# Altium PCB Left.PcbDoc
Units mm, origin at the board's own origin, x right, y up, seen from the top; angles counter-clockwise.
Board outline 24.13 x 34.29 mm, 2 copper layers (Top Layer, Bottom Layer); 33 components, 41 nets, 155 pads, 53 vias.
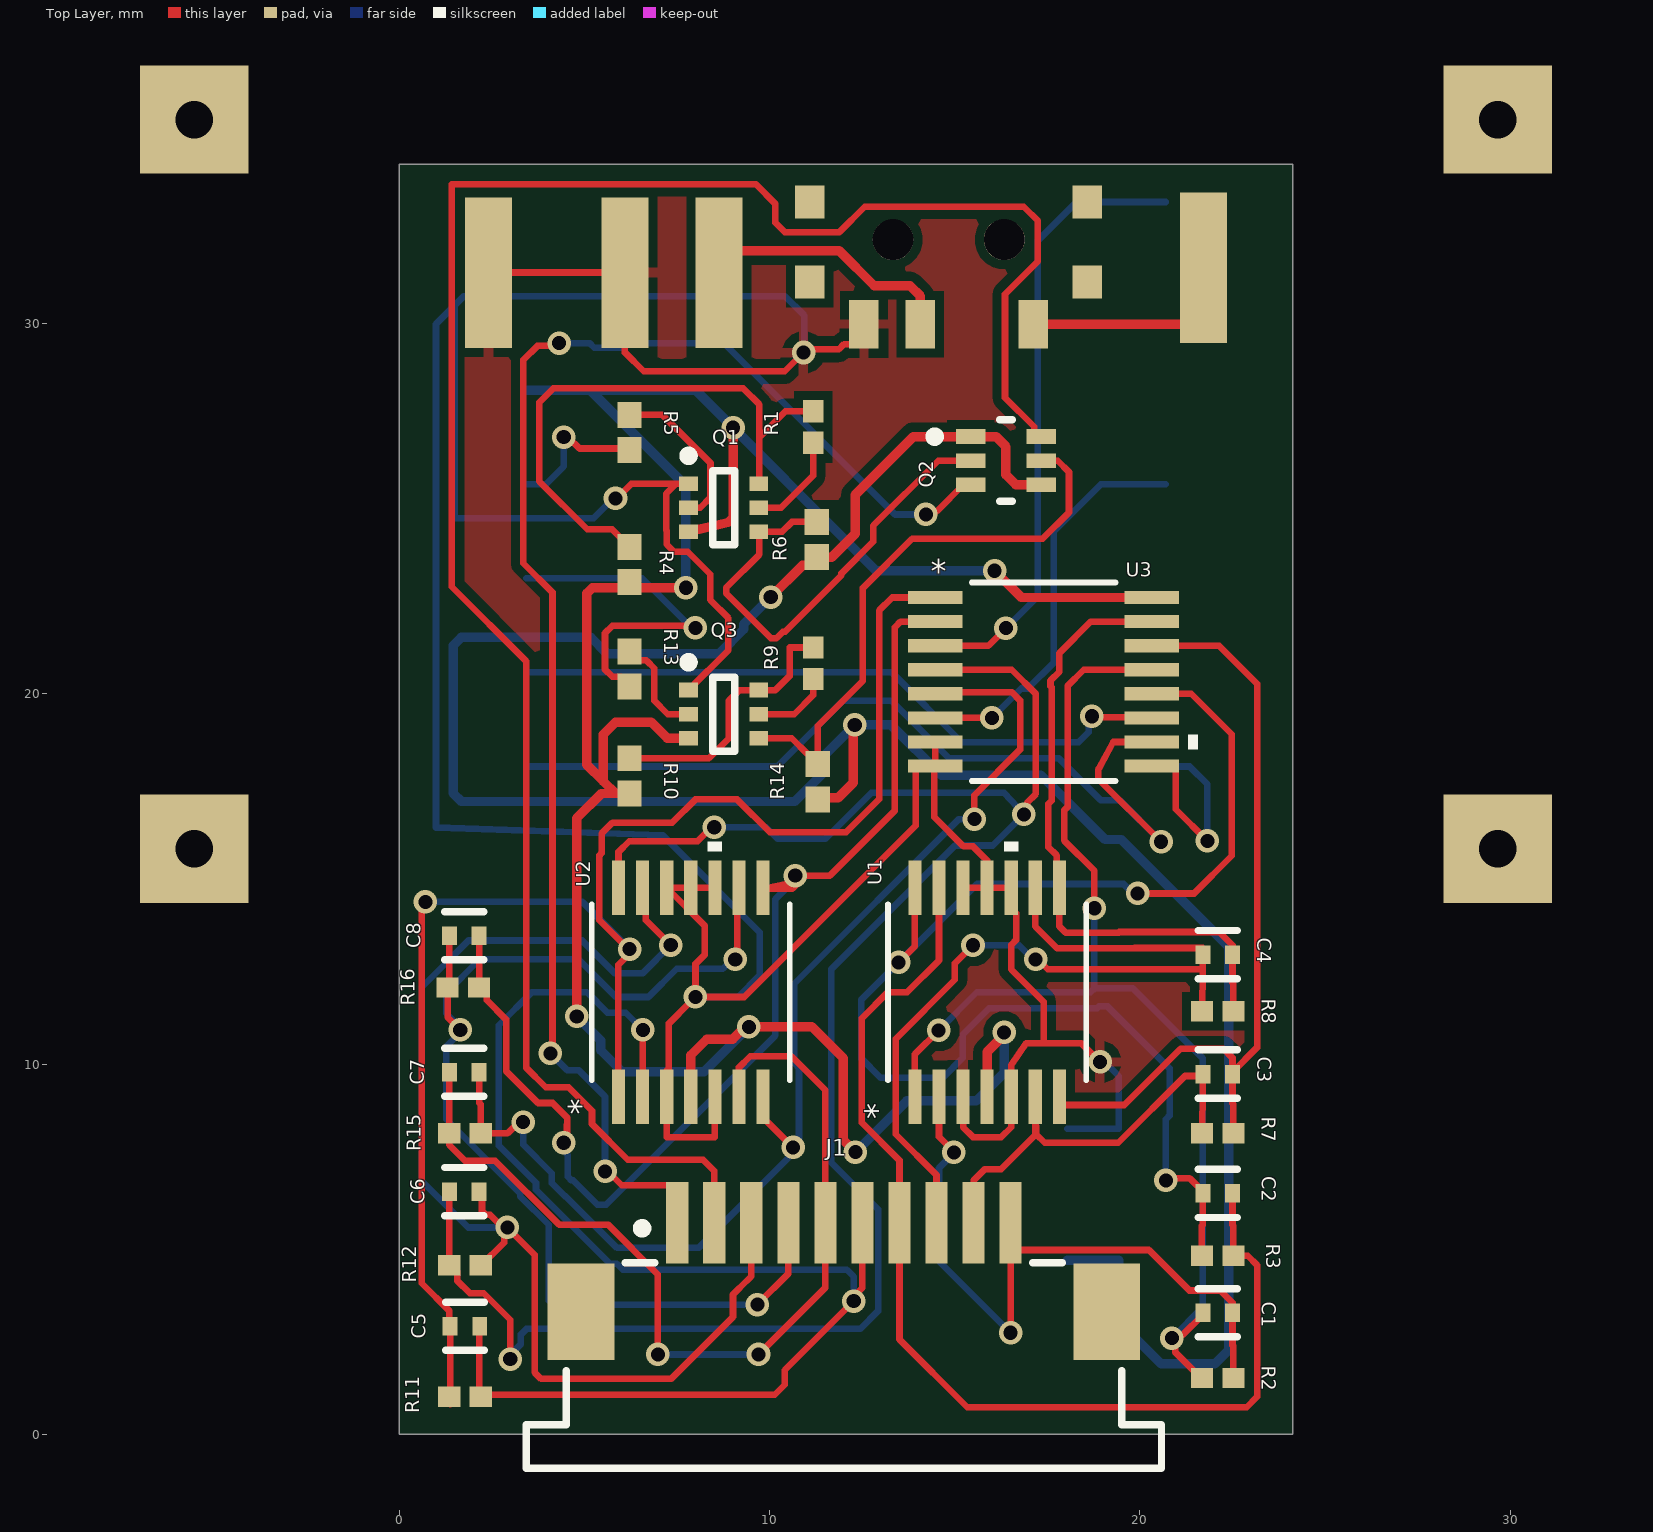
[diagram p0: Top Layer view]
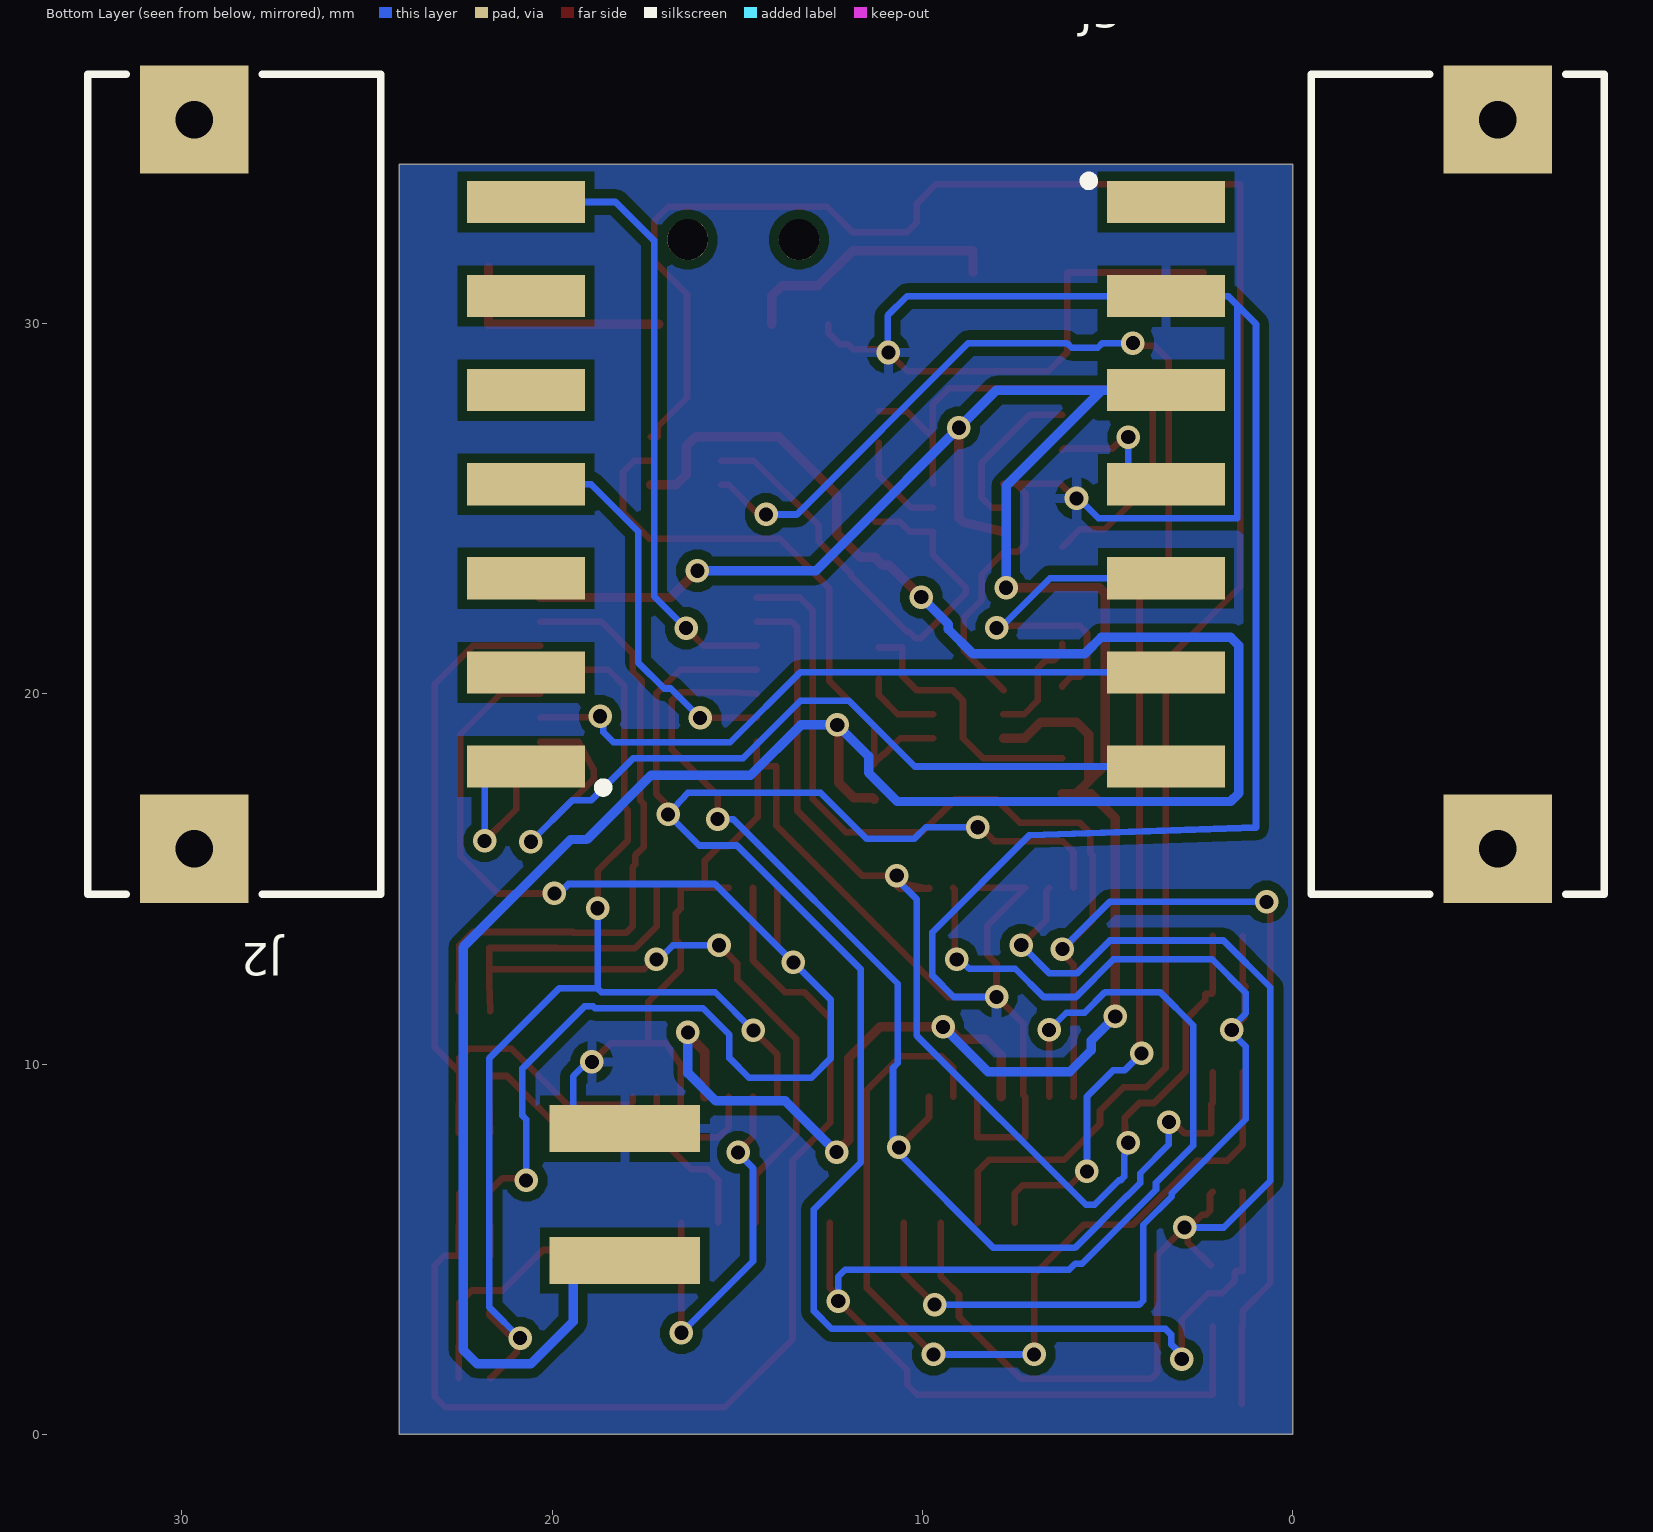
[diagram p1: Bottom Layer view, seen from below]

## Layer stack, top to bottom
Top Solder: solder mask 0.0102, Solder Resist, Dk 3.5
Top Layer: signal copper 0.0356
Dielectric 1: dielectric 0.32, FR-4, Dk 4.8
Bottom Layer: signal copper 0.0356
Bottom Solder: solder mask 0.0102, Solder Resist, Dk 3.5

## Board outline
0,0 24.13,0 24.13,34.29 0,34.29

## Design rules (kind name [scope] priority, off if disabled: settings)
Clearance [All] p1: gap=0.25 ignorepadtopadclearanceinfootprint=FALSE
MinimumSolderMaskSliver [All] p1: minsoldermaskwidth=0.047
PolygonConnect [All] p1: connectstyle=Relief reliefconductorwidth=0.254 reliefentries=4 polygonreliefangle="90 Angle" airgapwidth=0.254
RoutingVias [All] p1: holewidth=0.381 width=0.635 viastyle="Through Hole" minholewidth=0.381 minwidth=0.635 maxholewidth=0.508 maxwidth=0.762
SMDNeckDown [All] p1: percent=75.000
SilkToSilkClearance [All] p1: silktosilkclearance=0.076
SilkToSolderMaskClearance [IsPad] p1: minsilkscreentomaskgap=0.2 clearancetoexposedcopper=TRUE
SolderMaskExpansion [All] p1: expansion=0.102 istentingtop=FALSE
Width Width_1 [(InNet('3V3') OR InNet('BatteryP') OR InNet('MCUP') OR InNet('N3'))] p1: maxlimit=0.254 minlimit=0.254 preferedwidth=0.254
Width [All] p2: maxlimit=0.254 minlimit=0.178 preferedwidth=0.178
27 further rules are at their usual default settings.

## Components (designator, comment, footprint, x,y, rotation, side; value= is the part's Value field where it differs from the comment)
C1 "C1005C0G1H101J050BA" FP-C1005-050-0_05-MFG 22.1,3.284 r0 top
C2 "C1005C0G1H101J050BA" FP-C1005-050-0_05-MFG 22.1,6.507 r0 top
C3 "C1005C0G1H101J050BA" FP-C1005-050-0_05-MFG 22.1,9.731 r0 top
C4 "C1005C0G1H101J050BA" FP-C1005-050-0_05-MFG 22.1,12.954 r0 top
C5 "C1005C0G1H101J050BA" FP-C1005-050-0_05-MFG 1.778,2.921 r0 top
C6 "C1005C0G1H101J050BA" FP-C1005-050-0_05-MFG 1.759,6.556 r0 top
C7 "C1005C0G1H101J050BA" FP-C1005-050-0_05-MFG 1.759,9.779 r0 top
C8 "C1005C0G1H101J050BA" FP-C1005-050-0_05-MFG 1.759,13.462 r0 top
J1 "68611014122" 68611014122 12.009,1.865 r0 top
J2 "IPL1-107-02-S-SH-K" FP-IPL1-107-02-S-SH-K-0 20.701,25.654 r0 bottom
J3 "IPL1-107-02-S-SH-K" FP-IPL1-107-02-S-SH-K-0 3.429,25.654 r180 bottom
Q1 "MBT3946DW1T2G" ONSC-SC70-6-419B-02_W_V 8.763,25.019 r0 top
Q2 "SSM6N7002KFU,LF" FP-SSOP6-P-0_65A-MFG 16.383,26.289 r0 top
Q3 "MBT3946DW1T2G" ONSC-SC70-6-419B-02_W_V 8.763,19.446 r0 top
R1 "RC0402JR-0712KL" RESC1005X40X25NL05T10 11.176,27.201 r90 top
R2 "RC0402JR-0712KL" RESC1005X40X25NL05T10 22.098,1.524 r180 top
R3 "RC0402JR-0712KL" RESC1005X40X25NL05T10 22.098,4.826 r180 top
R4 "RE0402DR-07100KL" RESC1005X37X25ML05T10 6.223,23.486 r270 top
R5 "RE0402DR-07100KL" RESC1005X37X25ML05T10 6.223,27.051 r270 top
R6 "RE0402DR-07100KL" RESC1005X37X25ML05T10 11.276,24.161 r270 top
R7 "RC0402JR-0712KL" RESC1005X40X25NL05T10 22.098,8.128 r180 top
R8 "RC0402JR-0712KL" RESC1005X40X25NL05T10 22.098,11.43 r180 top
R9 "RC0402JR-0712KL" RESC1005X40X25NL05T10 11.176,20.82 r90 top
R10 "RE0402DR-07100KL" RESC1005X37X25ML05T10 6.223,17.78 r270 top
R11 "RC0402JR-0712KL" RESC1005X40X25NL05T10 1.778,1.016 r180 top
R12 "RC0402JR-0712KL" RESC1005X40X25NL05T10 1.778,4.572 r180 top
R13 "RE0402DR-07100KL" RESC1005X37X25ML05T10 6.223,20.668 r270 top
R14 "RE0402DR-07100KL" RESC1005X37X25ML05T10 11.303,17.62 r270 top
R15 "RC0402JR-0712KL" RESC1005X40X25NL05T10 1.778,8.128 r180 top
R16 "RC0402JR-0712KL" RESC1005X40X25NL05T10 1.734,12.065 r180 top
U1 "MCP6004T-I/ST" TSSOP14_MC_MCH 15.875,11.938 r90 top
U2 "MCP6004T-I/ST" TSSOP14_MC_MCH 7.874,11.938 r90 top
U3 "74HC4051PW" SOT403-1_NXP 17.399,20.32 r0 top

## Footprints (in the part's own frame and the unit in brackets; to place one, negate y for a bottom-side part, rotate by r counter-clockwise, add the part's x,y. Pads: shape width x height; smd on the part's side, far side on the other; paste and mask are expansions set on the pad)
68611014122 [mm] "ZIF Connectors, Horizontal, Top Contact, pitch 1mm, 10p"
  rect 0.6x2.2 smd: 1(-4.5,3.85) 2(-3.5,3.85) 3(-2.5,3.85) 4(-1.5,3.85) 5(-0.5,3.85) 6(0.5,3.85) 7(1.5,3.85) 8(2.5,3.85) 9(3.5,3.85) 10(4.5,3.85)
  rect 1.8x2.6 smd: M1(-7.1,1.45) M2(7.1,1.45)
  silkscreen extent -8.58,-2.77 8.58,3.82, body extent -8.5,-2.7 8.5,4.4, height 3.02
FP-C1005-050-0_05-MFG [mm]
  rect 0.4x0.5 smd paste+0 mask+0: 1(-0.4,0) 2(0.4,0)
  silkscreen extent -0.52,-0.65 0.53,0.65, body extent -0.7,-0.38 0.7,0.38, height 0.25
FP-IPL1-107-02-S-SH-K-0 [mm]
  rect 3.18x1.14 smd paste+0 mask+0: 1(0,7.62) 2(0,5.08) 3(0,2.54) 4(0,0) 5(0,-2.54) 6(0,-5.08) 7(0,-7.62)
  rect 2.92x2.92 hole 1.02 paste-1000 mask+0: 8(8.96,-9.842) 9(8.96,9.842)
  silkscreen extent -2.2,-11.07 11.84,11.07, body extent -1.38,-10.92 11.67,10.92, height 6.6
FP-SSOP6-P-0_65A-MFG [mm]
  rect 0.8x0.4 smd paste+0 mask+0: 1(-0.95,0.65) 2(-0.95,0) 3(-0.95,-0.65) 4(0.95,-0.65) 5(0.95,0) 6(0.95,0.65)
  silkscreen extent -2.05,-1.1 0.18,1.1, body extent -1.45,-1.2 1.45,1.2, height 0.25
ONSC-SC70-6-419B-02_W_V [mm] "SOT23, 6-Leads, Body 2x1.25mm, Pitch 0.65mm"
  rect 0.5x0.4 smd: 1(-0.95,0.65) 2(-0.95,0) 3(-0.95,-0.65) 4(0.95,-0.65) 5(0.95,0) 6(0.95,0.65)
  silkscreen extent -1.07,-1 0.3,1.52, body extent -0.63,-1 0.63,1, height 1.1
RESC1005X37X25ML05T10 [mm] "Chip Resistor, 2-Leads, Body 1.00x0.50mm, IPC Low Density"
  rect 0.7x0.65 smd: 1(-0.475,0) 2(0.475,0)
  body extent -0.53,-0.27 0.53,0.28, height 0.37
RESC1005X40X25NL05T10 [mm] "Chip Resistor, 2-Leads, Body 1.00x0.50mm, IPC Medium Density"
  rect 0.6x0.55 smd: 1(-0.425,0) 2(0.425,0)
  body extent -0.53,-0.27 0.53,0.28, height 0.4
SOT403-1_NXP [mil]
  rect 58x14 smd paste+0 mask+0: 1(-115,89.57) 2(-115,63.98) 3(-115,38.39) 4(-115,12.8) 5(-115,-12.8) 6(-115,-38.39) 7(-115,-63.98) 8(-115,-89.57) 9(115,-89.57) 10(115,-63.98) 11(115,-38.39) 12(115,-12.8) 13(115,12.8) 14(115,38.39) 15(115,63.98) 16(115,89.57)
  silkscreen extent -76,-106 164,106, body extent -130,-101 130,101, height 43
TSSOP14_MC_MCH [mil]
  rect 58x14 smd paste+0 mask+0: 1(-110.98,76.77) 2(-110.98,51.18) 3(-110.98,25.59) 4(-110.98,0) 5(-110.98,-25.59) 6(-110.98,-51.18) 7(-110.98,-76.77) 8(110.98,-76.77) 9(110.98,-51.18) 10(110.98,-25.59) 11(110.98,0) 12(110.98,25.59) 13(110.98,51.18) 14(110.98,76.77)
  silkscreen extent -94,-105 160,105, body extent -126,-100 126,100, height 47

## Part data
C1 C2 C3 C4 C5 C6 C7 C8: library part CMP-2000-05991-2, "Multilayer Ceramic Capacitors 100pF ±5% 50V C0G SMD 0402", Capacitance=100pF, Case Code (Imperial)=0402, Case Code (Metric)=1005, Dielectric=C0G, Dielectric Material=Ceramic, Max Operating Temperature=125°C, Min Operating Temperature=-55°C, Package Quantity=1, Temperature Coefficient=30ppm/°C, Tolerance=5%, Voltage=50V, Case/Package=0402, Construction=Flat, Depth=0.5mm, Height=0.5mm, Lead Free="Lead Free", Length=1mm, Mount="Surface Mount", Number of Pins=2, Packaging="Tape and Reel", Radiation Hardening=No, REACH SVHC="No SVHC", RoHS Compliant=Yes, Series=C, Termination=SMD/SMT, Thickness=0.022inch, Voltage Rating=50V, Voltage Rating (DC)=50V, Weight=2.3E-05oz, Width=0.5mm
J1: library part CMP-1502-01471-2, "68611014122 FPC connect for left", Contact Resistance=20mΩ, Current Rating=1A, Flammability Rating="UL94 V-0", Insulation Resistance=100MΩ, Max Operating Temperature=85°C, Min Operating Temperature=-25°C, Operating Supply Voltage=125V, Actuator Material=Polyphenylene, Contact Material="Bronze, Tin", Contact Plating=Tin, Gender=Male, Housing Material=Polyphenylene, Lead Pitch=1mm, Length=17mm, Mount="Surface Mount", NexarPartId=8917682, Number of Contacts=10, Number of Pins=10, Number of Positions=10, Number of Rows=1, Orientation=Horizontal, Packaging="Tape and Reel", Pitch=1mm, REACH SVHC="No SVHC", RoHS=Compliant, Termination=Solder, Voltage Rating=125V, Width=2.95mm
J2 J3: library part CMP-02766-000183-1, "7 Position 1 Row .100\" (2.54 mm) pitch connector", Gender=Male, Mount="Surface Mount", Number of Contacts=7, Orientation="Right Angle", Packaging=Bulk, Pitch=2.54mm, Radiation Hardening=No, Termination=Solder
Q1 Q3: library part CMP-1048-00392-1, "Complementary General Purpose Transistors, 6-Pin SC70, Pb-Free, Tape and Reel", Manufacturer="On Semiconductor", ComponentLink1Description="Manufacturer URL", ComponentLink1URL=http://www.onsemi.com/, ComponentLink2Description=Datasheet, ComponentLink2URL=http://www.onsemi.com/pub_link/Collateral/MBT3946DW1T1-D.PDF, ComponentLink3Description="Package Specification", ComponentLink3URL=http://www.onsemi.com/pub_link/Collateral/SMF05C-D.PDF, DatasheetVersion="Rev. 7", IC Continuous (A)=0.2, Mounting Technology="Surface Mount", PackageDescription="6-Pin Small Outline Transistor, Body 2 x 1.25 mm, Pitch 0.65 mm", PackageReference=SC70-6-419B-02_W, PackageVersion="Rev. W", Packing="Tape and Reel", PartNumber=MBT3946DW1T2G, Polarity=Complementary, RoHS=TRUE
Q2: library part CMP-35916-000009-1, "MOSFET 2N-CH 60V 0.3A", Continuous Drain Current (ID)=300mA, Drain to Source Voltage (Vdss)=60V, Input Capacitance=40pF, Max Power Dissipation=285mW, FET Type="2 N-Channel", Mount="Surface Mount", Packaging="Tape and Reel", Rds On Max=1.5R
R1 R2 R3 R7 R8 R9 R11 R12 R15 R16: library part CMP-2002-07921-1, "12K resistor", Manufacturer="Yageo / Phycomp", Part Number=RC0402JR-0712KL
R4 R5 R6 R10 R13 R14: library part CMP-2002-01850-1, "100K resistor", Manufacturer="Yageo / Phycomp", Part Number=RE0402DR-07100KL
U1 U2: "4-channel operational amplifer", Mfr_Name=Microchip, Digi-Key_Part_Number_1=MCP6004T-I/STCT-ND, Digi-Key_Part_Number_2=MCP6004T-I/STDKR-ND, Digi-Key_Part_Number_3=MCP6004T-I/STTR-ND, RefDes=RefDes, Type=Type
U3: "8-channel analog multiplexer/demultiplexer", Mfr_Name=NXP, Copyright="Copyright (C) 2023 Ultra Librarian. All rights reserved.", Digi-Key_Part_Number_1=568-2259-1-ND, Digi-Key_Part_Number_2=568-2259-2-ND, Digi-Key_Part_Number_3=568-2259-6-ND, Digi-Key_Part_Number_4=568-8288-5-ND, Manufacturer_Part_Number=74HC4051PW, RefDes=RefDes, Type=DEV

## Free pads (board coordinates)
  rect 0.8x0.9 smd: 19(11.089,31.115) 19(11.089,33.274) 19(18.582,31.115) 19(18.582,33.274)
  rect 0.8x1.3 smd: 20(12.549,29.972) 22(17.121,29.972) 23(14.073,29.972)
  round 1.1 hole 1.1: 21(13.335,32.258) 21(16.335,32.258)
  rect 1.27x4.064 smd: A(2.413,31.369) B(21.717,31.496) E(8.636,31.369) F(6.096,31.369)
  rect 4.064x1.27 smd far side: C(18.034,4.699) D(18.034,8.255)

## Via types
v1: diameter 0.635, hole 0.381, Top Layer to Bottom Layer, 53 vias

## Nets (pads, with @x,y where several pads share a name; then routed paths per layer and width w, separated by ;. In a path a pad name is that pad's centre, name@x,y a point inside that pad or via, vN(x,y) a via of type N, cw(c..) or ccw(c..) an arc to the next point about the centre after c; other vN are vias at no path point)
3V3: J3.3 Q1.3 Q3.3 R4.2 R10.2 U1.4 U2.4 U3.16 | length 71.2
  Top Layer w0.254: v1(4.797,11.285) 4.797,16.641 5.461,17.305 5.842,17.305 ; R10.2 5.842,17.305 ; v1@7.734,22.86 5.22,22.86 5.071,22.711 5.071,18.076 5.512,17.635 ; Q3.3 7.244,18.796 6.812,19.228 5.842,19.228 5.512,18.898 5.512,17.635 ; Q1.3 8.82,24.606 8.89,24.623 8.941,24.674 9.017,24.75 v1(9.017,27.178) ; U2.4 7.874,10.236 8.306,10.668 9.002,10.668 9.339,11.005 v1(9.442,11.005) ; v1@9.398,11.049 v1(9.442,11.005) ; v1(12.319,7.62) 11.989,7.95 11.989,10.16 11.144,11.005 v1(9.442,11.005) ; U1.4 15.875,10.325 16.334,10.784 v1(16.334,10.854) ; v1(16.078,23.317) 16.8,22.595 U3.16 ; 5.512,17.635 5.842,17.305
  Bottom Layer w0.254: J3.3 5.156,28.194 ; v1(4.797,11.285) 5.446,10.635 5.446,10.37 6.022,9.793 8.231,9.793 v1(9.442,11.005) ; v1(7.743,22.86) 7.743,25.608 5.156,28.194 ; v1(12.319,7.62) 13.704,9.005 15.584,9.005 16.334,9.755 v1(16.334,10.854) ; v1(16.078,23.317) 12.878,23.317 8.001,28.194 5.156,28.194
Con_1: J3.6 U3.11 | length 18.2
  Top Layer w0.178: v1(18.704,19.388) 18.725,19.366 20.298,19.366 U3.11
  Bottom Layer w0.178: J3.6 13.304,20.574 15.189,18.689 18.343,18.689 18.616,18.962 18.616,19.301 v1(18.704,19.388)
Con_2: J3.7 U3.10 | length 24
  Top Layer w0.178: U3.10 19.279,18.695 18.893,17.978 18.872,17.939 18.872,17.894 18.872,17.704 v1(20.574,16.002)
  Bottom Layer w0.178: J3.7 10.211,18.034 11.989,19.812 13.285,19.812 14.836,18.261 17.803,18.261 18.939,17.125 19.451,17.125 v1(20.574,16.002)
Con_3: J2.1 U3.9 | length 5.8
  Top Layer w0.178: U3.9 20.879,18.045 20.968,17.956 20.968,16.878 v1(21.823,16.023)
  Bottom Layer w0.178: J2.1 21.342,18.034 21.823,17.553 v1(21.823,16.023)
Duty_cycle_N: J3.5 R13.2 | length 9.5
  Top Layer w0.178: R13.2 6.223,20.218 5.987,20.454 5.758,20.454 5.559,20.653 5.559,21.633 5.758,21.832 7.946,21.832 v1(8.001,21.776)
  Bottom Layer w0.178: J3.5 6.56,23.114 7.898,21.776 v1(8.001,21.776)
Duty_cycle_P: J3.4 R5.2 | length 3.9
  Top Layer w0.178: v1(4.445,26.924) 4.569,26.924 4.874,26.619 6.18,26.619 R5.2
  Bottom Layer w0.178: J3.4 3.964,25.654 4.445,26.135 v1(4.445,26.924)
GND: J3.2 pad.20 pad.A pad.D pad.F Q1.1 Q3.1 U1.3 U1.5 U1.10 U1.11 U1.12 U2.3 U2.5 U2.10 U2.11 U2.12 U3.7 U3.8 | length 113.3
  Top Layer w0.178: pad.A pad.F 6.096,29.21 6.604,28.702 10.414,28.702 11.009,29.297 11.875,29.297 12.013,29.436 12.238,29.436 12.549,29.747 pad.20 ; v1(5.842,25.273) 5.876,25.273 6.272,25.669 7.483,25.669 ; U2.3@7.224,9.715 7.224,9.834 U2.3@7.238,9.848 ; U2.3@7.284,9.834 U2.3@7.284,9.715 ; 7.552,11.362 7.284,11.094 U2.3@7.284,9.715 ; 7.565,11.375 v1(8.001,11.811) ; Q3.1 8.89,21.173 8.89,22.041 8.399,22.532 8.399,23.224 7.793,23.83 7.423,23.83 7.224,24.029 7.224,24.399 7.214,24.409 7.214,25.4 7.483,25.669 ; Q1.1 7.483,25.669 ; U2.5 8.524,8.026 7.224,8.026 U2.3 7.284,9.179 U2.3@7.284,9.715 ; U2.10 U2.11 U2.12 8.255,13.726 8.255,12.957 8.001,12.703 v1(8.001,11.811) ; U3.7 U3.8 U3.8@14.453,18.045 ; U1.3 15.225,8.295 15.494,8.026 16.256,8.026 16.525,8.295 U1.5 16.525,9.96 16.531,9.97 16.931,10.566 17.399,10.566 ; U1.12 U1.11 ; v1(18.923,10.056) 18.413,10.566 17.399,10.566 ; v1(8.001,11.811) 9.32,11.811 13.945,16.435 13.945,18.045 U3.8@14.453,18.045 ; U3.8@14.453,18.045 14.453,16.662 15.24,15.875 15.494,15.875 15.875,15.494 U1.11 ; U1.11 U1.10 16.525,14.198 16.658,14.065 16.658,14.005 16.658,13.347 16.525,13.213 16.525,12.555 17.399,11.681 17.399,10.566
  Bottom Layer w0.178: v1(5.842,25.273) 5.789,25.273 5.255,24.74 1.499,24.74 1.499,30.48 ; v1(8.001,11.811) 9.155,11.811 9.732,12.388 9.732,13.56 7.112,16.18 0.996,16.386 0.996,29.977 1.499,30.48 ; v1(10.922,29.21) 10.942,29.23 10.942,30.206 10.414,30.734 J3.2 1.753,30.734 1.499,30.48 ; pad.D 19.431,8.255 19.431,9.675 19.05,10.056 v1(18.923,10.056)
Insole_IN_A: J1.2 Q2.6 | length 56.3
  Top Layer w0.178: J1.2 8.509,7.112 8.204,7.417 6.172,7.417 5.207,8.382 5.207,8.74 4.572,9.375 3.96,9.375 3.429,9.906 3.429,20.879 1.422,22.885 1.422,33.757 9.627,33.757 10.16,33.223 10.16,32.715 10.414,32.461 11.887,32.461 12.573,33.147 16.866,33.147 17.247,32.766 17.247,31.674 16.358,30.785 16.358,27.991 17.145,27.203 17.145,26.939 Q2.6
Insole_IN_B: J1.1 Q2.3 | length 40.7
  Top Layer w0.178: v1(4.085,10.287) 4.14,10.342 4.14,22.733 3.353,23.52 3.353,29.007 3.734,29.388 4.242,29.388 v1(4.318,29.464) ; v1(5.559,7.101) 5.635,7.101 6.01,6.726 7.298,6.726 7.509,6.515 J1.1 ; v1(14.224,24.837) 14.311,24.925 14.519,24.925 15.233,25.639 Q2.3
  Bottom Layer w0.178: v1(4.085,10.287) 4.536,9.837 4.844,9.837 5.559,9.122 v1(5.559,7.101) ; v1(4.318,29.464) 5.144,29.464 5.271,29.337 5.973,29.337 6.1,29.464 8.763,29.464 13.39,24.837 v1(14.224,24.837)
Insole_OUT_1: C1.2 J1.10 R2.1 U1.2 | length 19.1
  Top Layer w0.178: U1.2 14.575,8.035 14.979,7.631 v1(14.979,7.613) ; v1(16.509,2.744) J1.10@16.509,4.978 ; J1.10 J1.10@16.509,4.978 ; R2.1 22.523,2.388 22.5,2.411 C1.2 22.5,3.556 22.17,3.886 21.336,3.886 20.244,4.978 J1.10@16.509,4.978
  Bottom Layer w0.178: v1(14.979,7.613) 14.979,7.595 14.575,7.191 14.575,4.678 v1(16.509,2.744)
Insole_OUT_2: C3.1 J1.9 R7.2 U1.6 | length 12.3
  Top Layer w0.178: J1.9 15.509,6.858 15.814,7.163 16.256,7.163 17.198,8.105 ; R7.2 21.7,8.942 C3.1@21.7,9.677 ; C3.1 C3.1@21.7,9.677 ; 17.198,8.105 17.429,7.874 19.415,7.874 21.218,9.677 C3.1@21.7,9.677 ; 17.198,8.105 17.175,8.128 U1.6 17.198,8.105
Insole_OUT_3: C4.1 J1.8 R8.2 U1.9 | length 22.8
  Top Layer w0.178: J1.8 14.509,7.005 13.408,8.105 13.408,10.679 15.003,12.273 15.003,12.717 v1(15.494,13.208) ; U1.9 17.175,13.716 17.77,13.121 19.844,13.121 19.855,13.132 21.7,13.132 C4.1 21.7,12.558 ; v1(17.181,12.827) 17.245,12.827 17.514,12.558 21.7,12.558 ; R8.2 21.7,12.194 21.7,12.558
  Bottom Layer w0.178: v1(15.494,13.208) 16.736,13.208 17.117,12.827 v1(17.181,12.827)
Insole_OUT_4: C2.2 J1.7 R3.1 U1.13 | length 30.3
  Top Layer w0.178: U1.13 14.575,12.797 13.719,11.941 13.198,11.941 12.488,11.231 12.488,8.421 13.509,7.4 J1.7 13.509,2.565 15.338,0.737 22.885,0.737 23.165,1.016 23.165,4.572 22.911,4.826 R3.1 22.523,5.639 22.5,5.662 C2.2
Insole_OUT_5: C5.2 J1.6 R11.1 U2.2 | length 37
  Top Layer w0.178: C5.2@2.159,2.921 2.159,1.072 10.141,1.072 10.41,1.34 10.41,1.737 v1(12.274,3.601) ; U2.2 6.578,9.123 6.578,10.918 v1(6.581,10.922) ; v1@12.319,3.556 12.319,3.77 12.509,3.96 J1.6
  Bottom Layer w0.178: v1(6.581,10.922) 6.12,11.383 5.626,11.383 5.068,11.941 3.584,11.941 2.692,11.049 2.692,7.798 3.695,6.795 3.695,6.608 5.693,4.609 5.881,4.609 6.045,4.445 12.09,4.445 12.274,4.261 v1(12.274,3.601)
Insole_OUT_6: C7.1 J1.5 R15.2 U2.6 | length 25.4
  Top Layer w0.178: C7.1 1.359,8.947 1.353,8.941 R15.2 1.353,7.816 1.778,7.391 2.591,7.391 4.318,5.664 5.639,5.664 6.985,4.318 v1(6.985,2.159) ; U2.6 9.174,9.906 9.479,10.211 10.592,10.211 11.509,9.294 J1.5 11.509,3.965 v1(9.703,2.159)
  Bottom Layer w0.178: v1(6.985,2.159) v1(9.703,2.159)
Insole_OUT_7: C8.1 J1.4 R16.2 U2.9 | length 31.7
  Top Layer w0.178: R16.2@1.27,12.09 1.359,12.179 C8.1 ; R16.2 1.309,11.264 v1(1.651,10.922) ; v1(9.076,12.827) 9.125,12.876 9.125,14.708 U2.9 ; v1(9.671,3.505) 10.509,4.343 J1.4
  Bottom Layer w0.178: v1(9.076,12.827) 8.997,12.827 8.743,12.573 7.493,12.573 6.731,11.811 5.858,11.811 4.842,12.827 2.178,12.827 1.27,11.919 1.27,11.367 1.651,10.986 1.651,10.858 1.27,10.477 1.27,8.509 3.267,6.512 3.267,6.431 4.039,5.659 4.039,3.609 4.143,3.505 v1(9.671,3.505)
Insole_OUT_8: C6.2 J1.3 R12.1 U2.13 | length 33.7
  Top Layer w0.178: C6.2 2.238,6.476 2.238,6.039 2.35,5.927 2.458,5.927 2.797,5.588 v1(2.921,5.588) ; R12.1 2.228,4.572 2.834,5.178 2.834,5.501 v1(2.921,5.588) ; U2.13 6.663,14.668 6.663,13.881 v1(7.334,13.21) ; J1.3 9.509,4.266 9.405,4.162 9.399,4.162 9.014,3.777 9.014,3.172 7.341,1.499 3.834,1.499 3.658,1.676 3.658,4.851 v1(2.921,5.588)
  Bottom Layer w0.178: v1(2.921,5.588) 1.866,5.588 0.61,6.844 0.61,12.071 1.873,13.335 4.939,13.335 5.828,12.446 6.57,12.446 v1(7.334,13.21)
MCU_ADC: J2.7 U3.3 | length 16.8
  Top Layer w0.178: U3.3 15.91,21.295 v1(16.383,21.768)
  Bottom Layer w0.178: v1(16.383,21.768) 17.247,22.631 17.247,32.233 18.288,33.274 J2.7
Muxer_1: C1.1 R2.2 U1.1 U3.13 | length 32
  Top Layer w0.178: U1.1 13.925,10.267 v1(14.567,10.909) ; v1(18.771,14.205) 18.771,15.221 17.954,16.038 17.954,16.844 18.047,16.938 18.047,20.206 18.486,20.645 U3.13 ; v1(20.862,2.599) v1@21.002,2.46 ; R2.2 21.648,1.524 20.949,2.223 20.949,2.407 v1@21.002,2.46 ; C1.1 21.7,3.234 21.153,2.687 21.073,2.687 21.002,2.616 v1@21.002,2.46
  Bottom Layer w0.178: v1(14.567,10.909) 15.596,11.938 18.666,11.938 18.771,12.042 ; v1(18.771,14.205) 18.771,12.042 ; v1(20.862,2.599) 21.692,3.429 21.692,10.16 19.809,12.042 18.771,12.042
Muxer_2: C3.2 R7.1 U1.7 U3.14 | length 21.7
  Top Layer w0.178: U1.7 17.825,8.983 17.914,8.894 19.579,8.894 21.099,10.414 22.25,10.414 22.5,10.164 C3.2@22.5,9.779 ; U3.14 22.139,21.295 23.165,20.269 23.165,10.444 C3.2@22.5,9.779 ; R7.1 22.523,8.915 22.5,8.938 C3.2 C3.2@22.5,9.779
Muxer_3: C4.2 R8.1 U1.8 U3.15 | length 17.2
  Top Layer w0.178: U3.15 18.675,21.945 17.825,21.095 17.825,20.589 17.587,20.351 17.587,20.204 17.62,20.171 17.62,17.115 17.526,17.021 17.526,15.86 17.759,15.627 17.759,15.382 17.825,15.316 17.825,13.716 17.993,13.548 19.427,13.548 19.442,13.564 22.144,13.564 22.5,13.208 C4.2 22.5,12.19 22.523,12.167 R8.1
Muxer_4: C2.1 R3.2 U1.14 U3.12 | length 37.9
  Top Layer w0.178: v1(13.487,12.745) 13.925,13.183 U1.14 ; v1(19.939,14.605) 21.463,14.605 22.479,15.621 22.479,18.903 21.387,19.995 U3.12 ; v1(20.701,6.858) 20.763,6.92 21.337,6.92 21.7,6.557 21.7,5.666 21.673,5.639 R3.2
  Bottom Layer w0.178: v1(19.939,14.605) 19.815,14.605 19.559,14.861 15.604,14.861 12.471,11.729 12.471,10.16 13.005,9.627 14.679,9.627 15.212,10.16 15.212,10.789 15.934,11.51 18.844,11.51 18.89,11.557 19.126,11.557 20.803,9.881 20.803,8.609 20.701,8.507 v1(20.701,6.858)
Muxer_5: C5.1 R11.2 U2.1 U3.1 | length 42.9
  Top Layer w0.178: v1(0.711,14.376) 0.61,14.275 0.61,4.082 1.358,3.334 1.358,2.922 C5.1@1.359,2.921 ; R11.2@1.378,0.823 C5.1 ; U2.1 5.918,9.125 5.918,12.673 6.223,12.979 v1@6.223,13.081 ; v1(6.223,13.102) 6.185,13.102 5.407,13.88 5.407,15.634 5.468,15.695 5.468,16.221 5.765,16.518 7.374,16.518 8.001,17.145 9.124,17.145 10.013,16.256 12.065,16.256 12.958,17.149 12.958,22.241 13.312,22.595 U3.1
  Bottom Layer w0.178: v1(0.711,14.376) 4.949,14.376 v1(6.223,13.102)
Muxer_6: C7.2 R15.1 U2.7 U3.5 | length 32.4
  Top Layer w0.178: C7.2 2.159,8.959 2.203,8.915 R15.1 2.923,8.128 3.225,8.43 v1(3.349,8.43) ; U2.7 9.824,8.56 v1(10.637,7.747) ; U3.5 15.108,20.041 16.54,20.041 16.764,19.817 16.764,18.491 15.531,17.258 v1(15.531,16.612)
  Bottom Layer w0.178: v1(3.349,8.43) 3.349,7.827 4.123,7.053 4.123,6.785 4.478,6.43 4.492,6.43 5.885,5.037 8.085,5.037 10.637,7.589 v1(10.637,7.747) 10.795,7.905 10.795,9.893 10.668,10.02 10.668,12.167 15.113,16.612 v1(15.531,16.612)
Muxer_7: C8.2 R16.1 U2.8 U3.2 | length 31.9
  Top Layer w0.178: C8.2 2.159,11.933 2.198,11.894 2.355,11.894 2.37,11.879 2.37,11.722 2.889,11.203 2.889,9.811 3.753,8.947 4.144,8.947 4.544,8.547 4.544,8.369 4.532,8.357 4.532,7.961 v1(4.445,7.874) ; U2.8 U2.8@9.824,14.732 ; v1@10.833,14.948 10.617,14.732 U2.8@9.824,14.732 ; U3.2 13.538,21.945 13.386,21.793 13.386,16.842 11.632,15.088 v1(10.693,15.088) 10.477,14.872 9.829,14.733 U2.8@9.824,14.732
  Bottom Layer w0.178: v1(4.445,7.874) 4.532,7.787 4.532,7.559 4.551,7.541 4.551,6.962 4.655,6.858 4.699,6.858 5.355,6.202 5.588,6.202 10.16,10.774 10.16,14.453 10.693,14.986 v1(10.693,15.088)
Muxer_8: C6.1 R12.2 U2.14 U3.4 | length 52.4
  Top Layer w0.178: C6.1 1.359,5.67 1.353,5.664 1.353,4.826 1.353,4.413 1.537,4.413 1.564,4.386 1.564,4.157 1.911,3.81 2.286,3.81 3.001,3.095 v1(3.001,2.032) ; U2.14 5.924,15.728 6.212,16.017 8.059,16.017 8.434,16.392 v1(8.509,16.392) ; U3.4 16.541,20.645 17.192,19.994 17.192,17.292 16.953,17.053 16.953,16.826 v1(16.866,16.739)
  Bottom Layer w0.178: v1(3.001,2.032) 3.001,2.156 3.287,2.441 3.287,2.698 3.437,2.849 12.45,2.849 12.93,3.329 12.93,6.08 11.663,7.348 11.663,12.552 15.011,15.9 16.027,15.9 v1(16.866,16.739) 16.332,17.323 12.751,17.323 11.506,16.078 10.227,16.078 9.912,16.392 v1(8.509,16.392)
N3: pad.C Q2.1 Q2.4 R6.2 R14.2 | length 69.4
  Top Layer w0.254: v1(10.033,22.606) 10.89,23.463 11.078,23.463 11.276,23.661 R6.2 11.684,23.686 12.311,24.312 12.311,25.366 13.883,26.939 Q2.1 16.114,26.939 16.383,26.67 16.383,25.908 16.652,25.639 Q2.4 ; R14.2 11.352,17.194 11.86,17.194 12.266,17.6 12.266,19.12 v1(12.302,19.156)
  Bottom Layer w0.254: v1(10.033,22.606) 9.304,21.877 9.304,21.738 8.648,21.082 5.614,21.082 5.175,21.521 1.683,21.521 1.462,21.3 1.462,17.308 1.683,17.087 10.679,17.087 11.452,17.86 11.452,18.306 12.319,19.173 12.319,19.283 12.446,19.156 13.283,19.156 14.644,17.795 17.326,17.795 19.059,16.061 19.499,16.061 22.403,13.157 22.403,2.286 22.022,1.905 20.574,1.905 19.431,3.048 19.431,4.699 pad.C ; v1(12.302,19.156) v1@12.374,19.228
NetQ1_2: Q1.2 R5.1 | length 4.4
  Top Layer w0.178: R5.1 7.109,27.526 8.407,26.227 8.407,25.298 8.128,25.019 Q1.2
NetQ1_4: Q1.4 Q2.2 R6.1 | length 13.1
  Top Layer w0.178: Q1.4 Q1.4@9.728,24.369 ; R6.1 10.604,24.636 10.338,24.369 Q1.4@9.728,24.369 ; Q2.2 14.554,26.289 12.802,24.536 12.802,24.105 11.94,23.243 11.94,23.195 10.418,21.673 10.364,21.673 10.187,21.496 10.04,21.496 8.827,22.709 8.827,22.856 9.728,23.758 Q1.4@9.728,24.369
NetQ1_5: Q1.5 R1.1 | length 2.7
  Top Layer w0.178: Q1.5 10.312,25.019 11.176,25.883 R1.1
NetQ1_6: Q1.6 R1.2 R4.1 | length 15.5
  Top Layer w0.178: R4.1 5.748,24.436 5.08,24.436 3.785,25.731 3.785,27.864 4.166,28.245 9.288,28.245 9.728,27.805 9.728,26.924 ; Q1.6 9.728,25.669 9.728,26.924 ; R1.2 10.43,27.626 9.728,26.924
NetQ2_5: Q2.5 Q3.4 R14.1 | length 15.4
  Top Layer w0.178: Q3.4 10.602,18.796 11.042,18.356 11.067,18.356 11.303,18.12 R14.1 ; R14.1@11.303,18.255 11.303,19.126 12.522,20.345 12.522,22.855 13.848,24.181 17.374,24.181 18.085,24.892 18.085,25.984 17.78,26.289 Q2.5
NetQ3_2: Q3.2 R13.1 | length 3
  Top Layer w0.178: R13.1@6.223,21.345 6.223,21.132 6.459,20.896 6.672,20.896 6.686,20.882 6.688,20.882 6.887,20.683 6.887,19.812 7.253,19.446 Q3.2
NetQ3_5: Q3.5 R9.1 | length 2.1
  Top Layer w0.178: Q3.5 10.668,19.446 11.176,19.954 R9.1
NetQ3_6: Q3.6 R9.2 R10.1 | length 7.2
  Top Layer w0.178: R10.1 8.365,18.255 8.906,18.796 8.906,19.812 9.19,20.096 Q3.6 10.16,20.096 10.541,20.477 10.541,21.245 R9.2
Reset: J2.4 U3.6 | length 10.9
  Top Layer w0.178: U3.6 v1(16.002,19.345)
  Bottom Layer w0.178: v1(16.002,19.345) 16.795,20.138 16.973,20.138 17.678,20.844 17.678,24.384 18.948,25.654 J2.4
SCL: J2.2
SDA: J2.3
Sleep: J2.5
Test: J2.6
VUSB: J3.1
pads on no net: J1.M1 J1.M2 J2.8 J2.9 J3.8 J3.9
copper on no net: | length 13.4
  Top Layer w0.254: 8.636,31.369 8.636,31.953 11.887,31.953 12.827,31.013 13.794,31.013 14.073,30.734 14.073,29.972 ; 17.121,29.972 21.717,29.972 21.717,31.496

## Polygon pours and split planes (outlines as drawn)
GND on Top Layer "GND_L01_P000" (solid, remove dead copper, pour order 0): 0,0 24.13,0 24.13,34.29 0,34.29
GND on Bottom Layer "GND_L02_P001" (solid, remove dead copper, pour order 1): 0,0 24.13,0 24.13,34.29 0,34.29

## Silkscreen, mask and mechanical layers (free items; w line width, h text height)
Mechanical 1:
  the board outline again, w0.15
Top Designator:
  lines w0.1: 10.644,30.67 14.835,30.67 ; 11.47,30.734 11.47,33.782 14.835,33.782 ; 12.549,29.527 12.549,30.67 14.073,30.67 ; 13.335,29.504 13.335,32.258 ; 13.335,33.599 13.335,32.258 ; 14.073,29.527 14.073,30.67 ; 15.593,29.468 15.593,30.67 14.835,30.67 ; 16.335,29.504 16.335,32.258 ; 16.335,33.6 16.335,32.258 ; 17.121,29.527 17.121,30.67 14.835,30.67 ; 18.201,30.734 18.201,33.782 14.835,33.782 ; 19.026,30.67 14.835,30.67 ; 19.09,32.258 10.581,32.258 10.581,33.782 ; 10.581,33.782 19.09,33.782 19.09,29.464 10.581,29.464 10.581,33.782 ; 13.335,32.258 14.835,32.258 16.335,32.258 ; 14.073,30.67 14.835,30.67 ; 14.835,30.67 14.835,33.782
Bottom Designator:
  circle w0.1: c9.525,6.985 r6.37

## Text inside footprints (layer, text, board x,y; h text height)
U1: Top 3D Body "*" at 14.671,9.751 h1.27 r90; Top Overlay "*" at 13.208,8.509 h0.64 r90
U2: Top 3D Body "*" at 6.67,9.751 h1.27 r90; Top Overlay "*" at 5.207,8.636 h0.64 r90
U3: Top 3D Body "*" at 15.215,21.526 h1.27; Top Overlay "*" at 14.351,22.987 h0.64